# Altium PCB LED_Validation_Board.PcbDoc
Units mil, origin at the board's own origin, x right, y up, seen from the top; angles counter-clockwise.
Board outline 3200 x 3750 mil, 2 copper layers (Top Layer, Bottom Layer); 33 components, 40 nets, 148 pads, 50 vias.
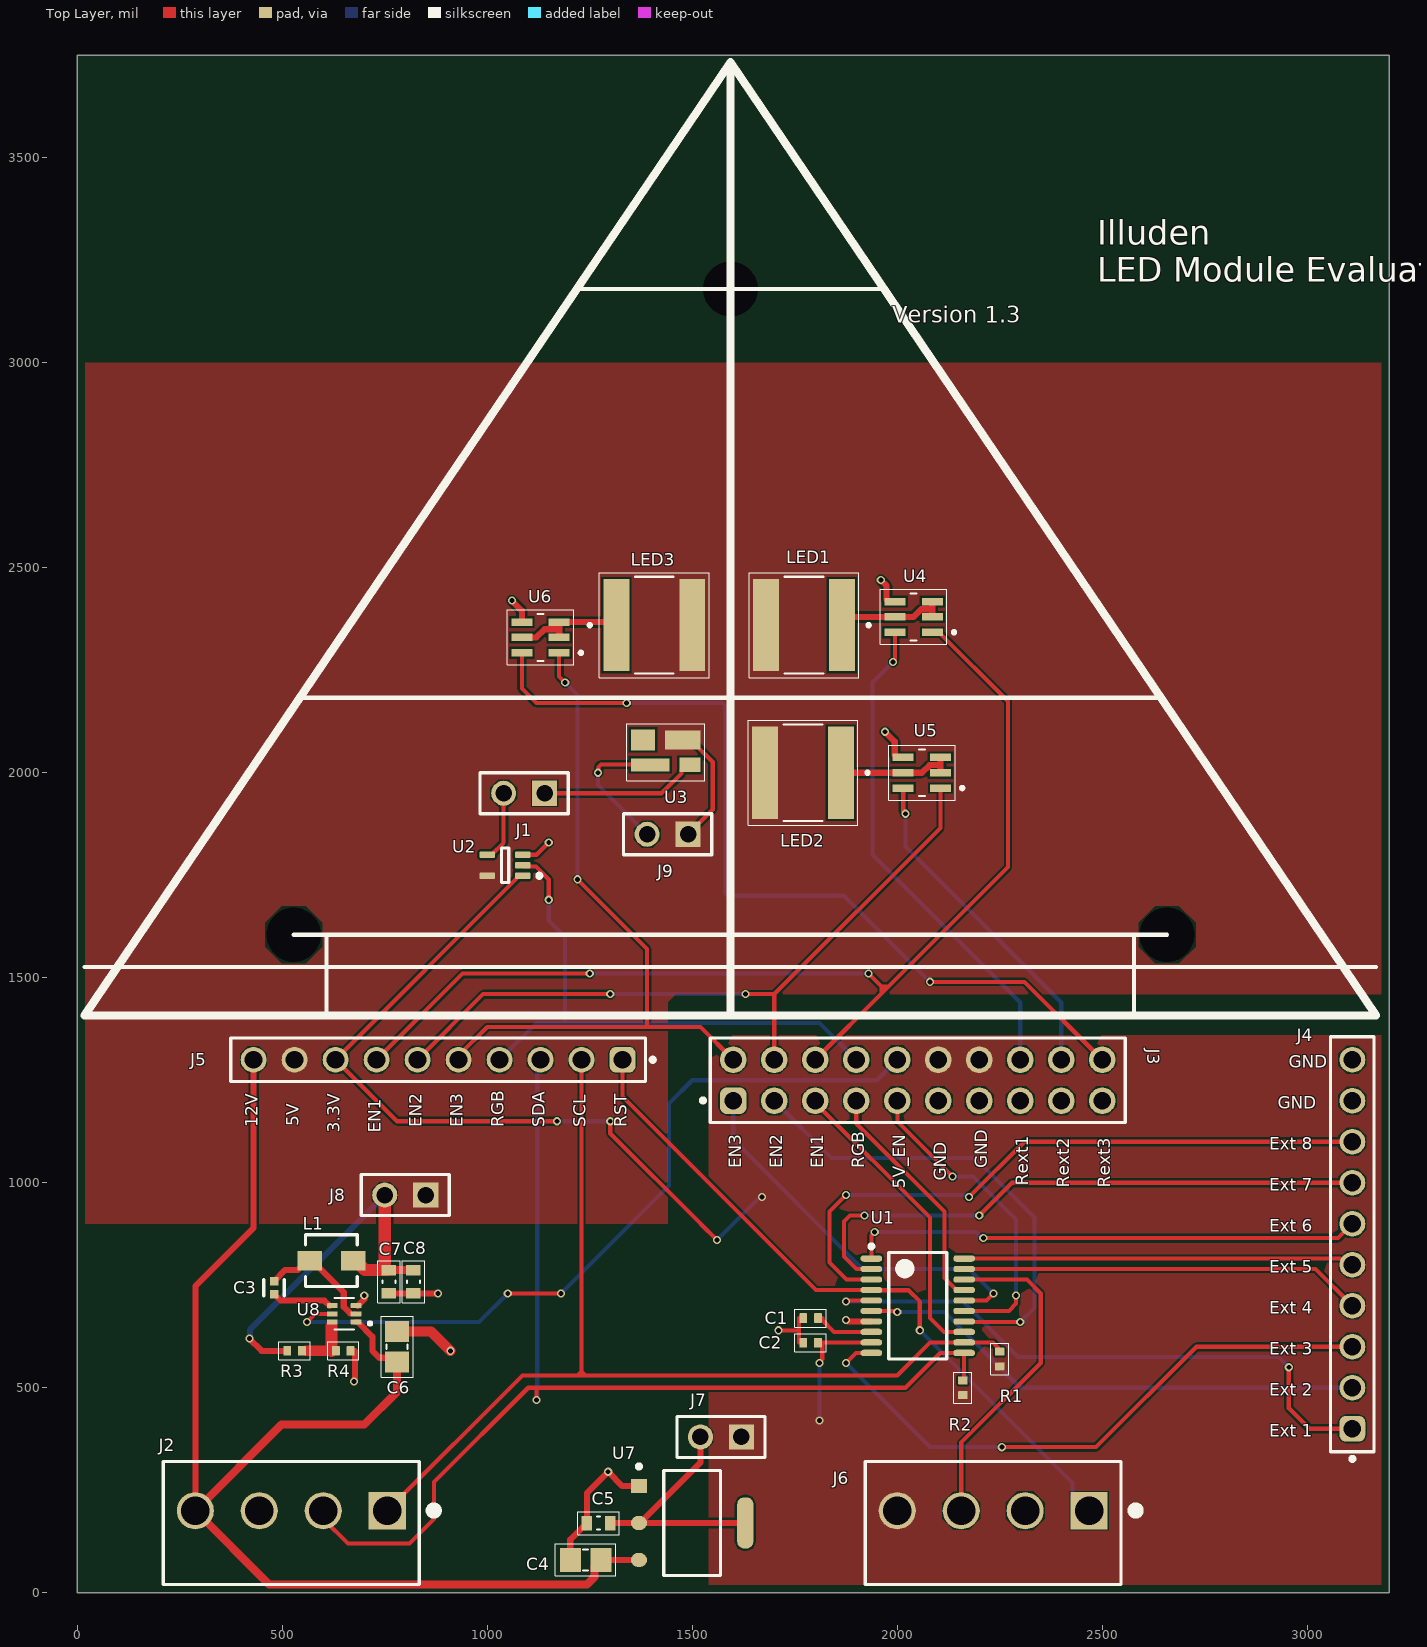
[diagram p0: Top Layer view]
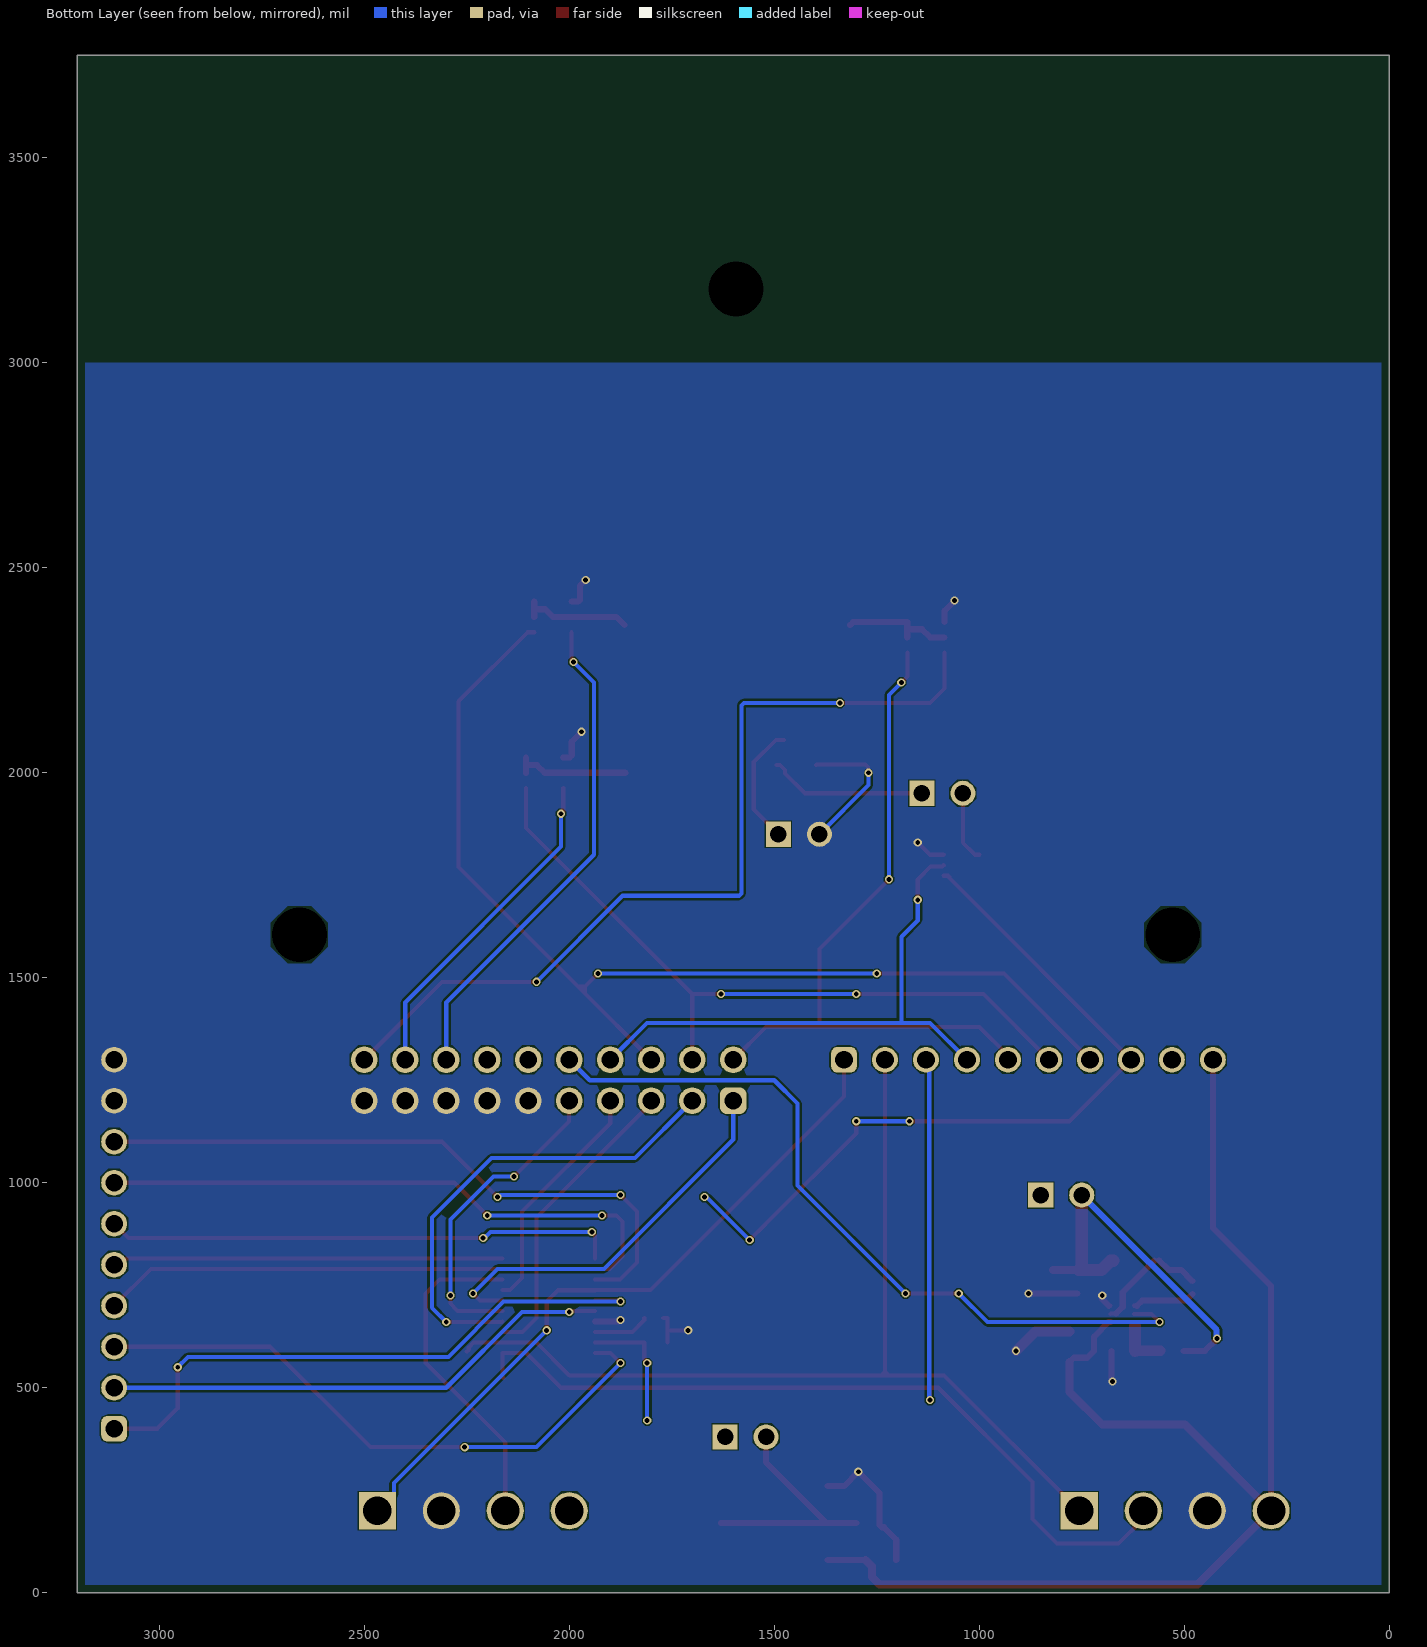
[diagram p1: Bottom Layer view, seen from below]
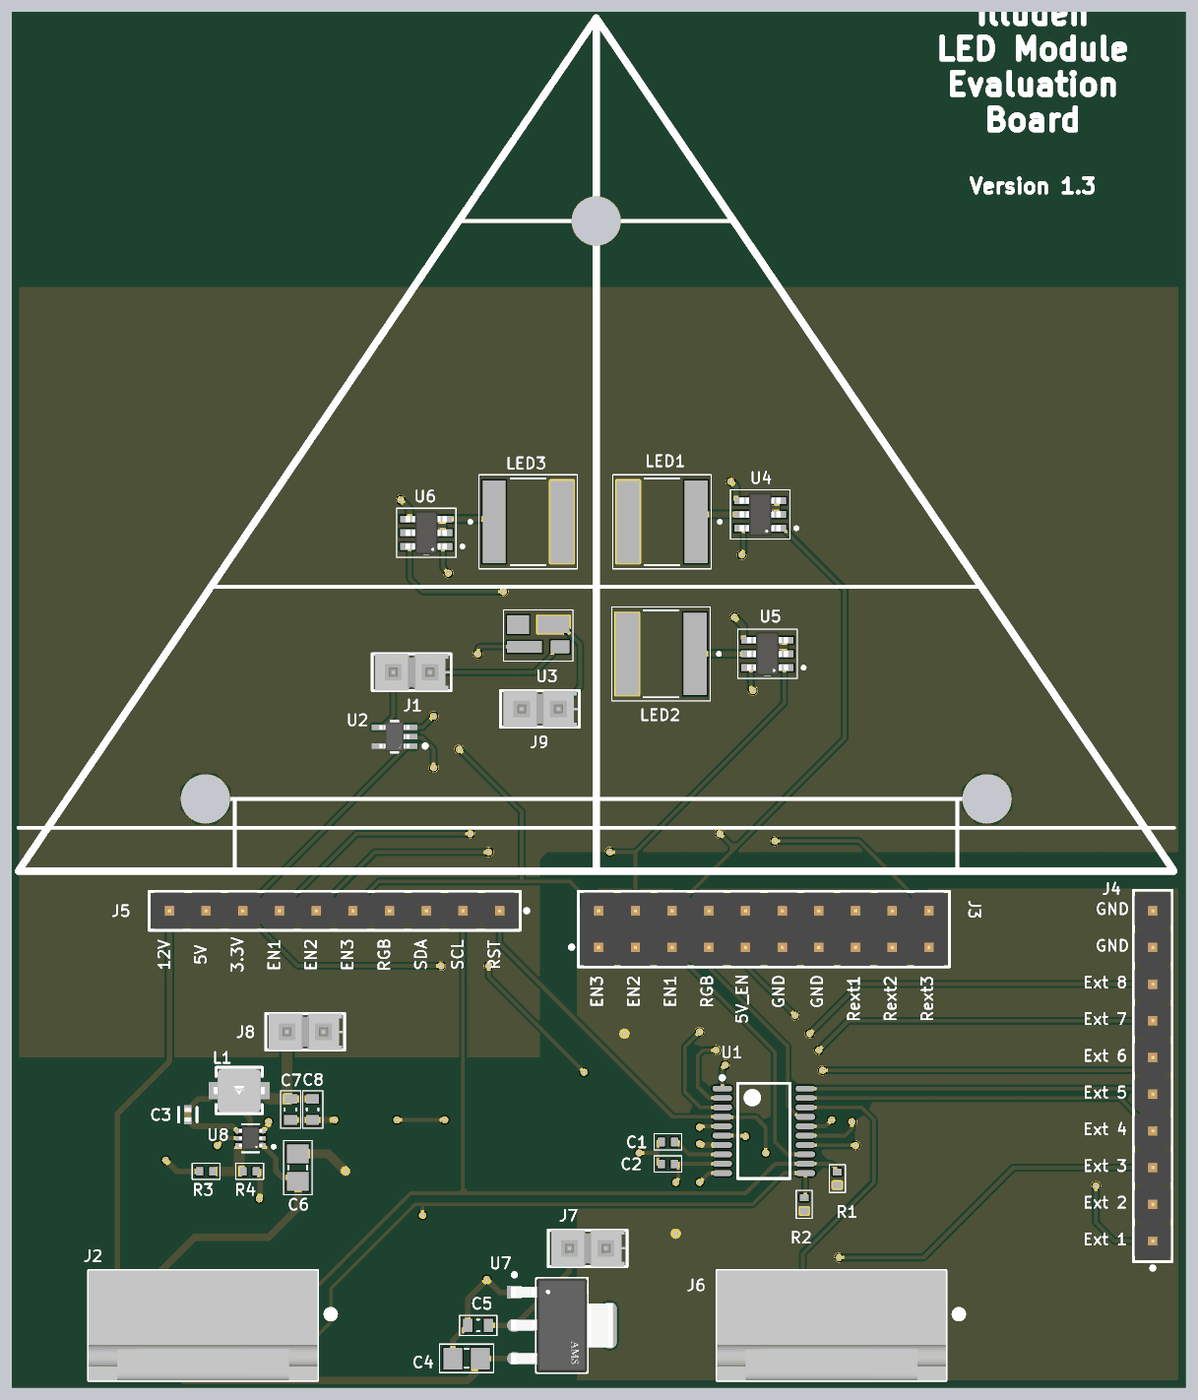
[diagram p2: 3D render of the assembled board from above, using the file's embedded part models]

## Layer stack, top to bottom
Top Solder: solder mask 0.4, Solder Resist, Dk 3.5
Top Layer: signal copper 1.4
Dielectric 1: dielectric 12.6, FR-4, Dk 4.8
Bottom Layer: signal copper 1.4
Bottom Solder: solder mask 0.4, Solder Resist, Dk 3.5

## Board outline
0,0 0,3750 3200,3750 3200,0

## Design rules (kind name [scope] priority, off if disabled: settings)
Clearance [All] p1: gap=5 ignorepadtopadclearanceinfootprint=FALSE except(2: Text-Text Text-Hole; 2.5: THPad-THPad THPad-Via THPad-Fill THPad-Poly THPad-Region THPad-Text THPad-Hole Via-Via Via-Fill Via-Poly Via-Region Via-Text Via-Hole Fill-Fill Fill-Poly Fill-Region Fill-Text Fill-Hole Poly-Poly Poly-Region Poly-Text Poly-Hole Region-Region Region-Text Region-Hole)
PolygonConnect [All] p1: connectstyle=Direct reliefconductorwidth=10 reliefentries=4 polygonreliefangle="90 Angle" airgapwidth=10
RoutingVias [All] p1: holewidth=12 width=20 viastyle="Through Hole" minholewidth=11.81 minwidth=15.75 maxholewidth=28 maxwidth=50
SolderMaskExpansion [All] p1: expansion=4 istentingtop=FALSE
Width [All] p1: maxlimit=100 minlimit=2 preferedwidth=10 minimp=50.000000 maximp=50.000000 favimp=50.000000
30 further rules are at their usual default settings.

## Classes and differential pairs
component class LED_Validation_Board_pg_2: C3 C4 C5 C6 C7 C8 J7 J8 L1 R3 R4 U7 U8
component class LED_Validation_Board_pg_1: C1 C2 J1 J2 J3 J4 J5 J6 J9 LED1 LED2 LED3 R1 R2 U1 U2 U3 U4 U5 U6

## Components (designator, comment, footprint, x,y, rotation, side; value= is the part's Value field where it differs from the comment)
C1 "1uF" "0402 PACKAGE" 1788.54,670 r0 top
C2 "100nF" "0402 PACKAGE" 1788.54,610 r0 top
C3 "100nF" FP-C0402-BB-MFG 480,744.25 r90 top value="0.10 μF"
C4 "10uF" "0805 PACKAGE" 1240,80 r0 top
C5 "22uF" "0603 PACKAGE" 1271.46,170 r0 top
C6 "10uF" "0805 PACKAGE" 780,600 r270 top
C7 "15uF" "0603 PACKAGE" 760,758.54 r90 top
C8 "15uF" "0603 PACKAGE" 820,758.54 r90 top
J1 "TSW-102-26-F-S" SMTC-TSW-102-26-XX-S 1140,1950 r180 top
J2 "640445-4" TECO-640445-4_V 522,200 r180 top
J3 "61302021121" 61302021121 2050,1250 r0 top
J4 "61301011121" 61301011121 3110,850 r90 top
J5 "61301011121" 61301011121 880,1300 r180 top
J6 "640445-4" TECO-640445-4_V 2234,200 r180 top
J7 "TSW-102-26-F-S" SMTC-TSW-102-26-XX-S 1620,380 r180 top
J8 "TSW-102-26-F-S" SMTC-TSW-102-26-XX-S 850,970 r180 top
J9 "TSW-102-26-F-S" SMTC-TSW-102-26-XX-S 1490,1850 r180 top
L1 "2.2uH" FP-IHLP-1212BZ-11-MFG 620,810 r0 top
LED1 "6500K LED" "2424 PACKAGE" 1772.52,2360 r180 top (schematic designator D1)
LED2 "5000K LED" "2424 PACKAGE" 1770,2000 r180 top (schematic designator D2)
LED3 "2700K LED" "2424 PACKAGE" 1407.48,2360 r0 top (schematic designator D3)
R1 "4.7kΩ" "0402 PACKAGE" 2250,570 r270 top
R2 "4.7kΩ" "0402 PACKAGE" 2160,500 r270 top
R3 "52.3kΩ" "0402 PACKAGE" 530,590 r0 top
R4 "10kΩ" "0402 PACKAGE" 648.54,590 r0 top
U1 "STM8S003F3P6" STM-TSSOP20_V 2050,700 r0 top
U2 "SN74LXC1T14DCKR" FP-DCK0005A-MFG 1043.31,1774.41 r180 top
U3 "Neopixel_3535" NEOPIXEL 1380,2080 r0 top
U4 "BCR421UW6-7" SOT95P280X140-6N 2040,2380 r180 top
U5 "BCR421UW6-7" SOT95P280X140-6N 2060,2000 r180 top
U6 "BCR421UW6-7" SOT95P280X140-6N 1130,2330 r180 top
U7 "AMS1117-3.3" FP-AMS1117-IPC_C 1499.72,170.16 r0 top
U8 "AP62301" AP62301 651.06,680.32 r180 top

## Footprints (in the part's own frame and the unit in brackets; to place one, negate y for a bottom-side part, rotate by r counter-clockwise, add the part's x,y. Pads: shape width x height; smd on the part's side, far side on the other; paste and mask are expansions set on the pad)
"0402 PACKAGE" [mm]
  rrect20% 0.49x0.6 smd: 1(-0.455,0) 2(0.455,0)
  silkscreen extent -0.97,-0.56 0.97,0.56
"0603 PACKAGE" [mm]
  rect 0.65x0.9 smd: 1(-0.725,0) 2(0.725,0)
  silkscreen extent -1.3,-0.71 1.3,0.69
"0805 PACKAGE" [mm]
  rect 1.3x1.5 smd: 1(-0.95,0) 2(0.95,0)
  silkscreen extent -1.88,-0.99 1.88,0.99
"2424 PACKAGE" [mm]
  rect 1.6x5.7 smd: 1(-2.35,0) 2(2.35,0)
  silkscreen extent -4.1,-3.25 3.4,3.25
61301011121 [mm] "Pin Header, pitch 2.54 mm, THT, Vertical, single row, 10p"
  rrect50% 1.6x1.6 hole 1.1: 1(-11.43,0)
  round 1.6 hole 1.1: 2(-8.89,0) 3(-6.35,0) 4(-3.81,0) 5(-1.27,0) 6(1.27,0) 7(3.81,0) 8(6.35,0) 9(8.89,0) 10(11.43,0)
  silkscreen extent -13.42,-1.35 12.85,1.35, body extent -12.7,-1.27 12.7,1.27, height 8.57
61302021121 [mm] "Pin Header, pitch 2.54 mm, THT, Vertical, dual row, 20p"
  rrect50% 1.65x1.65 hole 1.1: 1(-11.43,-1.27)
  round 1.65 hole 1.1: 2(-11.43,1.27) 3(-8.89,-1.27) 4(-8.89,1.27) 5(-6.35,-1.27) 6(-6.35,1.27) 7(-3.81,-1.27) 8(-3.81,1.27) 9(-1.27,-1.27) 10(-1.27,1.27) 11(1.27,-1.27) 12(1.27,1.27) 13(3.81,-1.27) 14(3.81,1.27) 15(6.35,-1.27) 16(6.35,1.27) 17(8.89,-1.27) 18(8.89,1.27) 19(11.43,-1.27) 20(11.43,1.27)
  silkscreen extent -13.43,-2.62 12.85,2.62, body extent -12.7,-2.54 12.7,2.54, height 8.59
AP62301 [mm] "Buck Converter"
  rrect16% 0.66x0.31 smd: 1(-0.735,0.5) 2(-0.735,0) 3(-0.735,-0.5) 4(0.735,-0.5) 5(0.735,0) 6(0.735,0.5)
  silkscreen extent -1.7,-0.97 0.6,0.97, body extent -0.8,-0.8 0.8,0.8, height 0.6
FP-AMS1117-IPC_C [mm]
  rect 1.004x0.872 smd paste+0 mask+0: 1(-3.295,2.29)
  rrect100% 1.004x0.872 smd paste+0 mask+0: 2(-3.295,0) 3(-3.295,-2.29)
  rrect87% 1.004x3.182 smd paste+0 mask+0: 4(3.295,0)
  silkscreen extent -3.42,-3.25 1.75,3.62, body extent -3.9,-3.35 3.9,3.35, height 0.25
FP-C0402-BB-MFG [mm]
  rect 0.52x0.52 smd paste+0 mask+0: 1(-0.4,0) 2(0.4,0)
  silkscreen extent -0.5,-0.64 0.5,0.64, body extent -0.8,-0.4 0.8,0.4, height 0.25
FP-DCK0005A-MFG [mm]
  rrect25% 0.95x0.4 smd paste+0 mask+0: 1(-1.1,0.65) 2(-1.1,0) 3(-1.1,-0.65) 4(1.1,-0.65) 5(1.1,0.65)
  silkscreen extent -2.25,-1.07 0.23,1.07, body extent -1.68,-1.17 1.68,1.17, height 0.25
FP-IHLP-1212BZ-11-MFG [mm]
  rect 1.5x1.2 smd paste+0 mask+0: 1(-1.35,0) 2(1.35,0)
  silkscreen extent -1.6,-1.6 1.6,1.6, body extent -2.2,-1.7 2.2,1.7, height 0.25
NEOPIXEL [mm]
  rect 1.3x0.9 smd: 1(2.9,-1.55)
  rect 2.2x1.2 smd: 2(2.45,0)
  rect 1.5x1.3 smd: 3(0,0)
  rect 2.4x0.8 smd: 4(0.45,-1.55)
  silkscreen extent -1.02,-2.54 3.81,1.02
SMTC-TSW-102-26-XX-S [mm] ".025 SQ Post Terminal Strip Assembly, 1x2 Pins, Vertical, 2.54mm Pitch, Male"
  rect 1.55x1.55 hole 1.02: 1(0,0)
  round 1.55 hole 1.02: 2(2.54,0)
  silkscreen extent -1.46,-1.27 4,1.27, body extent -1.4,-1.27 3.81,1.27, height 8.38
SOT95P280X140-6N [mm]
  rect 1.3x0.47 smd: 1(-1.155,0.95) 2(-1.155,0) 3(-1.155,-0.95) 4(1.155,-0.95) 5(1.155,0) 6(1.155,0.95)
  silkscreen extent -2.6,-1.7 2.06,1.7, body extent -1.43,-1.5 1.43,1.5, height 1.4
STM-TSSOP20_V [mm] "SOP, 20-Leads, Body 6.6x4.5mm, Pitch 0.65mm"
  oval 1.35x0.4 smd: 1(-2.875,2.925) 2(-2.875,2.275) 3(-2.875,1.625) 4(-2.875,0.975) 5(-2.875,0.325) 6(-2.875,-0.325) 7(-2.875,-0.975) 8(-2.875,-1.625) 9(-2.875,-2.275) 10(-2.875,-2.925) 11(2.875,-2.925) 12(2.875,-2.275) 13(2.875,-1.625) 14(2.875,-0.975) 15(2.875,-0.325) 16(2.875,0.325) 17(2.875,0.975) 18(2.875,1.625) 19(2.875,2.275) 20(2.875,2.925)
  silkscreen extent -3,-3.3 1.8,3.8, body extent -2.25,-3.3 2.25,3.3, height 1.2
TECO-640445-4_V [mil] "CONN, 4-Leads, Body 7.62x15.85mm, Pitch 3.962mm"
  rect 90.55x90.55 hole 70: 1(-234,0)
  round 90.55 hole 70: 2(-78,0) 3(78,0) 4(234,0)
  silkscreen extent -357,-120 312,180, body extent -312,-120 312,180, height 518

## Part data
C1: library part Capacitor, "CAP CER 1UF 10V X5R 0402"
C2: library part Capacitor, "CAP CER 0.1UF 10V X5R 0402"
C3: library part CMP-2008-02046-2, "CAP CER 0.1UF 10V X5R 0402", Capacitance="0.10 μF", Manufacturer=Kemet, Manufacturer Part Number=C0402C104K8PACTU, Package=C0402-BB, Temperature="-55°C to +125°C", Temperature Characteristic=X5R, Temperature Coefficient=15%, Temperature Range High=+125°C, Temperature Range Low=-55°C, Tolerance=0.1, Voltage Rating="10 V", Automotive=No, Category=Cap, ComponentLink2Description=Datasheet, ComponentLink2URL=https://content.kemet.com/datasheets/KEM_C1002_X7R_SMD.pdf, Device Class L1="Passive Components", Device Class L2=Capacitors, Device Class L3="Ceramic Capacitors", Digikey Description="CAP CER 0.1UF 10V X5R 0402", Height=0.55mm, Ipc Land Pattern Name=CAPC10050X50, Lead Free=Yes, Material=Ceramic, Mouser Description="Capacitor 100 nF 10 VDC 0402", Octopart=https://octopart.com/c0402c104k8pactu-kemet-140039, RoHS=TRUE
C4 C6: library part Capacitor, "Chip Multilayer Ceramic Capacitors for General Purpose, 0805, 10uF, X5R, 15%, 10%, 16V"
C5 C7 C8: library part Capacitor, "Chip Multilayer Ceramic Capacitors for General Purpose, 0603, 22uF, X5R, 15%, 20%, 10V"
J1 J7 J8 J9: library part CMP-1024-00329-1, "0.025\" SQ Post Header, Through-hole, Vertical, -55 to 125 degC, 2.54 mm Pitch, 2-Pin, Male, RoHS", Manufacturer=Samtec, Temperature Range="-55 to 125 degC", ComponentLink1Description="Manufacturer URL", ComponentLink1URL=http://www.samtec.com, ComponentLink2Description=Datasheet, ComponentLink2URL=http://www.samtec.com/documents/webfiles/pdf/TSW_TH.PDF, ComponentLink3Description="Package Specification", ComponentLink3URL=http://www.samtec.com/documents/webfiles/cpdf/TSW-XXX-XX-XXX-X-XX-XXX-MKT.pdf, DatasheetVersion=F-214, Mounting Technology=Through-hole, Orientation=Vertical, PackageDescription=".025[0.64] SQ. Post Terminal Strip Assembly", PackageReference=TSW-102-26-XX-S, PackageVersion="DM, 8/1988", PartNumber=TSW-102-26-F-S, Pitch="2.54 mm", RoHS=True
J2 J6: library part CMP-1684-00016-1, "Male Header, Pitch 3.962 mm, 1 x 4 Postion, Height 13.716 mm, Tail Length 3.175 mm, -55 to 105 degC, RoHS", Color=White, Current, Rating="7 /  / A", Flammability Rating=UL94V-0, Manufacturer="TE Connectivity", Package Description="Male Header, Pitch 3.962 mm, 1 x 4 Postion, Height 13.716 mm, Tail Length 3.175 mm", Package Reference=THD, Temperature, Operating="-55to+105 /  / °C", Voltage, Rating="600 /  / V", Agency Approvals=CSA,UL, Angle=Straight, Application=Forwire-to-board, Brand/Series=MTA-156Series, Color, Housing=White, Connector Type=Male, Contact Centerline Spacing="0.156 /  / in.", Contact Plating=Tin, Datasheet URL=http://www.te.com/commerce/DocumentDelivery/DDEController?Action=showdoc&DocId=Customer+Drawing%7F640445%7FAD5%7Fpdf%7FEnglish%7FENG_CD_640445_AD5.pdf%7F640445-4, Datasheet Version="Rev. AD5", Diameter, Insulation="0.095\"(SingleWire),0.07\"(MassTerminationWires)", Length, Overall="0.624 /  / \"", Length, Pin="0.125 /  / \"", Length, Terminal Post="0.125 /  / in.", Manufacturer URL=http://www.te.com, Material, Contact=CopperAlloy, Material, Housing=ThermoplasticPolyester, Mount Angle=Vertical, Mounting Hole Size="0.07 /  / \"", Mounting Type=PCBMount, Number of Contacts=4, Number of Positions=4, Number of Rows=1, Pin Spacing="0.156 /  / \"", Primary Type=InterconnectSystem, Special Features=IDC,Pinstrip, Standards=UL94V-0HousingFlammabilityRating,RoHSCompliant,ELVCompliant, Termination=Solder, Type=PCBPlug, Wire, AWG=26-18
J3: library part CMP-1502-01104-3, Color=Black, Contact Resistance=20mΩ, Current Rating=3A, Operating Supply Voltage=250V, Connector Type="Male Pin", Contact Material=Copper, Contact Mating Length=5.9944mm, Contact Plating=Gold, Gender=Male, Lead Pitch=2.54mm, Mount="Through Hole", NexarPartId=32855556, Number of Contacts=20, Number of Pins=20, Number of Positions=20, Number of Rows=2, Orientation=Vertical, Packaging=Bulk, Pitch=2.54mm, REACH SVHC=Unknown, RoHS=Compliant, Row Spacing=2.54mm, Termination=Solder
J4 J5: library part CMP-1502-01082-5, Color=Black, Contact Resistance=20mΩ, Current Rating=3A, Flammability Rating="UL94 V-0", Insulation Resistance=1GΩ, Max Operating Temperature=105°C, Min Operating Temperature=-40°C, Operating Supply Voltage=250V, Connector Type="Male Pin", Contact Gender=Male, Contact Material=Copper, Contact Mating Length=5.9944mm, Contact Plating=Gold, Gender=Male, Height=8.74mm, Housing Material=PBT, Lead Pitch=2.54mm, Length=2.54mm, Mount="Through Hole", NexarPartId=18818159, Number of Contacts=10, Number of Pins=10, Number of Positions=10, Number of Rows=1, Orientation=Vertical, Packaging=Bulk, Pitch=2.54mm, REACH SVHC=Unknown, RoHS=Compliant, Termination=Solder, Voltage Rating=250V, Width=25.4mm
L1: library part CMP-02424-000689-1, "FIXED IND 2.2UH 3A 46 MOHM SMD", Case/Package=1212, Current Rating=3A, DC Resistance (DCR)=46mR, Inductance tolerance=20%, Max Operating Temperature=125°C, Min Operating Temperature=-55°C, Package Quantity=3000, Saturation Current=3.3A, Self Resonant Frequency=55MHz, Test Frequency=100kHz, Contact Plating=Tin, Core Material=Metal, Depth=3.2mm, Height=2mm, Height - Seated (Max)=0.079inch, Inductance=2.2uH, Lead Free="Lead Free", Length=3.6mm, Max DC Current=3A, Military Standard=Not, Mount="Surface Mount", Number of Pins=2, Packaging="Tape and Reel", Radiation Hardening=No, Rated Current-Max=3A, RMS Current (Irms)=3A, RoHS Compliant=Yes, Series=IHLP-1212BZ-11, Shielding=Shielded, Termination=SMD/SMT, Tolerance=20%, Width=3mm
LED1: "6500k LED", Supplier Part Number 1=475-GWPLLRA1.CM-M7N2-XX53-1-700-R18CT-ND, Supplier 1=Digikey
LED2: "5000k LED", Supplier Part Number 1=475-GWPLLRA1.CM-M7N2-XX51-1-700-R18CT-ND, Supplier 1=Digikey
LED3: "2700k LED", Supplier Part Number 1=475-GWPLLRA1.CM-M3M8-XX58-1-700-R18CT-ND, Supplier 1=Digikey
R1 R2: library part Resistor
R3 R4: library part Resistor, "RES 10K OHM 1% 1/16W 0402"
  R3: Supplier 1=Mouser
  R4: Supplier 1="Future Electronics"
U1: library part CMP-2000-07166-1, "Value Line, 16 MHz STM8S 8-Bit MCU, 8 Kbyte Flash, 128 Byte Data EEPROM, 10-Bit ADC, 3 Timers, 2.95 to 5.5 V, -40 to 85 degC, 20-Pin TSSOP, RoHS, Tube", Manufacturer=STMicroelectronics, Operating Temperature=-40°C~85°C, Package / Case="20-TSSOP(0.173\",4.40mmWidth)", Package Description="20-Pin Thin Shrink Small Outline Package, Body 6.5 x 4.4 mm, Pitch 0.65 mm", Package Reference=TSSOP20, Package Version="Rev. 2, 01/2015", Standard Package=74, Voltage - Supply (Vcc/Vdd)=2.95V~5.5V, Category=IntegratedCircuits(ICs), Connectivity=I²C,IrDA,LIN,SPI,UART/USART, Core Processor=STM8, Core Size=8-Bit, Data Converters=A/D5x10b, Datasheet URL=http://www2.st.com/content/ccc/resource/technical/document/datasheet/42/5a/27/87/ac/5a/44/88/DM00024550.pdf/files/DM00024550.pdf/jcr:content/translations/en.DM00024550.pdf, Datasheet Version="Rev. 8, 04/2016", Dynamic Catalog=STM8S, EEPROM Size=128x8, Family=Embedded-Microcontrollers, Featured Product=FlasherSeriesofProductionTools, Manufacturer URL=http://www.st.com/, Mounting Technology=SurfaceMount, Number of I /O=16, Number of I/Os=16, Oscillator Type=Internal, Other Names=497-11946-5, Other Related Documents=STM8S003F3ViewAllSpecifications, Package URL=http://www.st.com/st-web-ui/static/active/en/resource/technical/document/datasheet/DM00141386.pdf, Packaging=Tube, Peripherals=Brown-outDetect/Reset,POR,PWM,WDT, Program Memory Size=8KB(8Kx8), Program Memory Type=FLASH, RAM Size=1Kx8, Series=STM8S, Speed=16MHz
U2: library part CMP-04899-000130-1, "IC TRANSLATOR UNIDIR SC70-5"
U4 U5 U6: "LED Driver"
U7: library part CMP-209535-000001-1, "LDO Voltage Regulators 1A, 3.3V", Dropout Voltage=1.1V, Manufacturer="Advanced Monolithic Systems", Max Junction Temp=+125°C, Max Power Dissipation=1.2W, Max Supply Voltage=15V, Nominal Supply Current=5mA, Output Current=1A, Output Voltage=3.3V, Package=AMS1117, Temperature="-40°C to +125°C", Temperature Range Low=-40°C, Automotive=No, Category=IC, ComponentLink2Description=Datasheet, ComponentLink2URL=http://www.advanced-monolithic.com/pdf/ds1117.pdf, Device Class L1="Integrated Circuits (ICs)", Device Class L2="Power Management ICs", Device Class L3="Voltage Regulators - Linear", Height=1.8mm, Ipc Land Pattern Name=SOT229P700X180-4, Lead Free=Yes, Manufacturer Part Number=AMS1117-3.3, Number Of Outputs=1, Octopart=https://octopart.com/ams1117-3.3-advanced+monolithic+systems-25899300, Output Type=Fixed, RoHS=TRUE, Standoff Height=0.64mm, Temperature Range High=+125°C
U8: "Buck Converter  / SOT-563", Supplier Part Number 1=8144136, Supplier 1="Future Electronics"

## Free pads (board coordinates)
  round 118.11 hole 133.86: 2(528,1604.85) 3(1593,3179.65) 4(2658.3,1604.85)

## Via types
v1: diameter 20, hole 12, Top Layer to Bottom Layer, 50 vias

## Nets (pads, with @x,y where several pads share a name; then routed paths per layer and width w, separated by ;. In a path a pad name is that pad's centre, name@x,y a point inside that pad or via, vN(x,y) a via of type N, cw(c..) or ccw(c..) an arc to the next point about the centre after c; other vN are vias at no path point)
5V_EN: J3.10 U8.5 | length 1892.8
  Top Layer w10: v1(560,660) 580.32,680.32 U8.5 ; v1(1050,730) v1(1180,730)
  Bottom Layer w10: v1(560,660) 980,660 v1(1050,730) ; v1(1180,730) 1443.64,993.64 1443.64,1193.64 1500,1250 1950,1250 J3.10
5V_EN_Input: J3.9 U1.15 | length 778.6
  Top Layer w10: J3.9 2000.19,1199.81 2000.19,1149.81 v1(2135,1015) ; U1.15 2272.2,687.2 2290,705 v1(2290,725)
  Bottom Layer w10: v1(2135,1015) 2185,1015 2290,910 v1(2290,725)
+3v3: C2.2 J3.12 J3.14 J5.8 J6.4 J7.1 R1.2 R2.2 U1.9 U2.1 | length 2240.5
  Top Layer w10: U2.1 1075.79,1748.82 1072.91,1745.94 1072.91,1742.91 J5.8 780,1150 v1(1170,1150) ; v1(1300,1150) 1300,1120.43 1520,900.43 1520,900 v1(1560,860) ; v1(1810,560) 1810,562.71 1817.09,569.79 1817.09,610 1817.52,610.43 U1.9
  Bottom Layer w10: v1(1170,1150) v1(1300,1150) ; v1(1560,860) 1663.09,963.09 1668.09,963.09 v1(1670,965) ; v1(1810,420) v1(1810,560)
+5: J5.9 J8.1 J9.1 LED1.2 LED2.2 LED3.2 U2.5 U3.2 | length 296.8
  Top Layer w10: U3.2 1496.14,2080 1550,2026.14 1550,1910 J9.1
+12: C4.2 C6.2 J2.4 J5.10 U7.3 U8.1 | length 3201.1
  Top Layer w15: J2.4 288,748 430,890 J5.10 ; U8.1 684.09,660.63 720,624.72 720,590 736.76,573.24 769.36,573.24 C6.2 ; C4.2 U7.3
  Top Layer w20: C6.2 780,490 700,410 498,410 J2.4 468,20 1243.28,20 1261.81,38.53 1261.81,64.41 C4.2
EN_1: J3.6 J5.7 U4.1 | length 2686.8
  Top Layer w10: J5.7 940,1510 v1(1250,1510) ; J3.6 1970,1470 ; v1(1930,1510) 1970,1470 ; 1962,1463 1962,1479 1976,1479 ; U4.1 2101.81,2342.6 2270,2174.41 2270,1770 1970,1470
  Bottom Layer w10: 1260,1510 v1(1930,1510)
EN_1_Input: J3.5 U1.13 | length 743.2
  Top Layer w10: J3.5 1800,1195 2080,915 2080,670 2113.98,636.02 U1.13
EN_2: J3.4 J5.6 U5.1 | length 1766.8
  Top Layer w10: J5.6 990,1460 v1(1300,1460) ; v1(1630,1460) 1700,1460 ; J3.4 1700,1460 ; U5.1 2105.47,1865.47 1700,1460
  Bottom Layer w10: v1(1300,1460) v1(1630,1460)
EN_2_Input: J3.3 U1.14 | length 1160
  Top Layer w10: U1.14 2164,660.81 2299.19,660.81 v1(2300,660)
  Bottom Layer w10: J3.3 1840,1060 2190,1060 2335,915 2335,695 v1(2300,660)
EN_3: J3.2 J5.5 U6.1 | length 1743.6
  Top Layer w10: J5.5 930,1310 1000,1380 1390,1380 ; U6.1 1175.47,2234.53 v1(1190,2220) ; v1(1220,1740) 1390,1570 1390,1380 ; J3.2 1520,1380 1390,1380
  Bottom Layer w10: v1(1190,2220) 1220,2190 v1(1220,1740)
EN_3_INPUT: J3.1 U1.16 | length 964.3
  Top Layer w10: U1.16 2217.8,712.8 v1(2235,730)
  Bottom Layer w10: J3.1 1600,1105 1915,790 2175,790 v1(2235,730)
extra_1: J4.1 U1.5 | length 1485
  Top Layer w10: v1(1875,710) 1877.8,712.8 U1.5 ; v1(2955,550) 2955,450 3005,400 J4.1
  Bottom Layer w10: v1(1875,710) 2160,710 2295,575 2930,575 v1(2955,550)
extra_2: J4.2 U1.6 | length 1250.7
  Top Layer w10: U1.6 1997.8,687.2 v1(2000,685)
  Bottom Layer w10: v1(2000,685) 2115,685 2300,500 J4.2
extra_3: J4.3 U1.10 | length 1493.5
  Top Layer w10: v1(1875,560) 1899.84,584.84 U1.10 ; v1(2255,355) 2485,355 2730,600 J4.3
  Bottom Layer w10: v1(1875,560) 2080,355 v1(2255,355)
extra_4: J4.4 U1.19 | length 983.9
  Top Layer w10: U1.19 3020.43,789.57 J4.4
extra_5: J4.5 U1.20 | length 953.1
  Top Layer w10: U1.20 3080.5,815.16 3095.66,800 J4.5
extra_6: J4.6 U1.1 | length 1253.9
  Top Layer w10: U1.1 1936.81,871.81 v1(1945,880) ; v1(2210,865) 3075,865 J4.6
  Bottom Layer w10: v1(1945,880) 2192.29,880 2207.29,865 v1(2210,865)
extra_7: J4.7 U1.2 | length 1443.8
  Top Layer w10: v1(1920,920) 1885,920 1870,905 1870,820 1900.43,789.57 U1.2 ; v1(2200,920) 2280,1000 J4.7
  Bottom Layer w10: v1(1920,920) v1(2200,920)
extra_8: J4.8 U1.3 | length 1593.4
  Top Layer w10: v1(1875,970) 1835,930 1835,805 1876.02,763.98 U1.3 ; v1(2175,965) 2310,1100 J4.8
  Bottom Layer w10: v1(1875,970) 2167.29,970 2172.29,965 v1(2175,965)
GND: C1.1 C2.1 C4.1 C5.1 C6.1 C7.1 C8.1 J2.3 J3.11 J3.13 J3.15 J3.17 J3.19 J4.9 J4.10 J6.2 J9.2 R4.2 U1.7 U2.3 U3.4 U4.4 U5.4 U6.4 U7.1 U8.3 | length 1559.9
  Top Layer w10: U8.3 U8.3@684.09,700 ; U2.3 1120,1800 v1(1150,1830) ; v1(1270,2000) 1271.21,2001.21 1271.21,2014.14 1277.07,2020 1396.69,2020 U3.4 ; v1(1710,640) 1760,640 ; 1760,610 1760,640 ; C1.1 1760,670 1760,640
  Top Layer w15: v1(675,515) 677.09,517.09 677.09,590 ; U8.3@684.09,700 700,715.91 v1(700,725) ; C7.1 C8.1 v1(880,730) ; v1(1060,2420) 1084.53,2395.47 U6.4 ; C4.1 1202.6,129.68 1232.7,159.78 1237.62,159.78 1242.91,165.08 C5.1 1242.91,242.91 v1(1295,295) 1329.68,260.32 U7.1 ; v1(1875,665) 1876.35,665 1879.74,661.61 U1.7 ; v1(1960,2470) 1973.94,2456.06 1973.94,2421.65 1978.19,2417.4 U4.4 ; v1(1970,2100) 1993.94,2076.06 1993.94,2041.65 1998.19,2037.4 U5.4
  Top Layer w25: C6.1 862.6,637.4 v1(910,590)
  Bottom Layer w10: v1(1270,2000) 1270,1970 J9.2
NetC1_2: C1.2 U1.8 | length 136.7
  Top Layer w10: 1817.09,670 1817.09,665.08 1846.14,636.02 U1.8
NetC3_1: C3.1 U8.4 | length 153.9
  Top Layer w10: U8.4@615.24,700 U8.4
  Top Layer w15: C3.1 495.91,712.6 602.64,712.6 U8.4@615.24,700
NetC3_2: C3.2 L1.1 U8.2 | length 295.2
  Top Layer w10: L1.1@560.94,810 L1.1 L1.1@572.76,810 ; 665.92,681.42 678.9,681.42 U8.2
  Top Layer w15: C3.2 507.4,787.4 538.35,787.4 L1.1@560.94,810 ; L1.1@572.76,810 650,732.76 650,697.34 665.92,681.42
NetC5_2: C5.2 J7.2 U7.2 U7.4 | length 600.4
  Top Layer w15: C5.2 1300.16,170.16 U7.2 U7.2@1372.6,170.16 ; J7.2 1520,317.56 U7.2@1372.6,170.16 ; U7.4 U7.2@1372.6,170.16
NetC7_2: C7.2 C8.2 J8.2 L1.2 R3.1 | length 923.1
  Top Layer w15: v1(420,620) 450,590 501.46,590 ; C7.2@750,794.88 757.8,787.09 C7.2
  Top Layer w20: C7.2 C8.2
  Top Layer w30: L1.2 679.06,810 701.97,787.09 C7.2@757.8,787.09 ; C7.2@750,794.88 J8.2
  Bottom Layer w15: v1(420,620) 420.96,620.96 420.96,640.96 J8.2
NetJ1_1: J1.1 U3.1 | length 387.4
  Top Layer w10: J1.1 1425.2,1950 1473.58,1998.39 1473.58,2006.26 1486.3,2018.98 U3.1
NetJ1_2: J1.2 U2.4 | length 172.9
  Top Layer w10: U2.4 1010.83,1800 1040,1829.17 J1.2
NetR3_2: R3.2 R4.1 U8.6 | length 121.5
  Top Layer w25: 558.54,590 620,590
  Top Layer w30: 620,590 620,650
OUT_1: LED1.1 U4.2 U4.3 U4.5 | length 273.9
  Top Layer w15: LED1.1 1885.04,2380 U4.5 2040,2380 2058.7,2398.7 2085.47,2398.7 ; U4.2 2085.47,2398.7 ; U4.3 2085.47,2398.7
OUT_2: LED2.1 U5.2 U5.3 U5.5 | length 288.1
  Top Layer w15: LED2.1 U5.5 2060,2000 2078.7,2018.7 2105.47,2018.7 ; U5.2 2105.47,2018.7 ; U5.3 2105.47,2018.7
OUT_3: LED3.1 U6.2 U6.3 U6.5 | length 279.7
  Top Layer w15: U6.5 1120,2330 1140,2350 1174.17,2350 1175.47,2348.7 ; U6.2 1175.47,2348.7 ; LED3.1 1307.56,2367.4 U6.3 1175.47,2348.7
PD1: J6.3 U1.18 | length 811.2
  Top Layer w10: J6.3 2156,366 2350,560 2350,730 2316.02,763.98 U1.18
Rext_1: J3.16 U4.6 | length 1214.3
  Top Layer w10: v1(1990,2270) 1990,2272.71 1994.53,2277.23 U4.6
  Bottom Layer w10: v1(1990,2270) 1940,2220 1940,1800 2300,1440 J3.16
Rext_2: J3.18 U5.6 | length 822.3
  Top Layer w10: U5.6 2014.53,1905.47 v1(2020,1900)
  Bottom Layer w10: v1(2020,1900) 2020,1820 2400,1440 J3.18
Rext_3: J3.20 U6.6 | length 2146.1
  Top Layer w10: U6.6 1084.53,2205.47 1120,2170 v1(1340,2170) ; v1(2080,1490) 2310,1490 J3.20
  Bottom Layer w10: v1(1340,2170) 1574.14,2170 1580,2164.14 1580,1705.86 1585.86,1700 1870,1700 v1(2080,1490)
RGB_SIG: J3.8 J5.4 U2.2 | length 1388.8
  Top Layer w10: U2.2 1089.49,1771.54 1118.46,1771.54 1150,1740 v1(1150,1690)
  Bottom Layer w10: J5.4 1120,1390 1190,1390 ; v1(1150,1690) 1150,1640 1190,1600 1190,1390 ; J3.8 1810,1390 1190,1390
RGB_SIG_Input: J3.7 U1.17 | length 581.6
  Top Layer w10: J3.7 1900,1145 2115,930 2115,767.87 2144.49,738.39 U1.17
RST: J5.1 J6.1 U1.4 | length 1703.2
  Top Layer w10: J5.1 1330,1210 1801.61,738.39 U1.4 1937.43,737.76 2027.24,737.76 2055,710 v1(2055,640)
  Bottom Layer w10: v1(2055,640) 2427.72,267.28 2427.72,240.28 J6.1
SCL: J2.1 J5.2 R1.1 U1.12 | length 2480.9
  Top Layer w10: J2.1 1086,530 1220,530 ; J5.2 1230,540 ; 1245,530 1240,530 ; R1.1 2249.72,587.91 2245.08,592.56 2245.08,598.54 2233.19,610.43 U1.12 2080.43,610.43 2000,530 1240,530 ; 1220,530 1231.84,530 ; 1220,530 1230,540 ; 1230,540 1230,531.84 1231.84,530 ; 1230,540 1240,530 ; 1231.84,530 1240,530
SDA: J2.2 J5.3 R2.1 U1.11 | length 2780
  Top Layer w10: J2.2 600,180 660,120 810,120 870,180 870,270 1100,500 1120,500 ; v1(1120,470) 1120,500 ; R2.1@2160,523.62 2163.19,526.81 U1.11 2104.84,584.84 2020,500 1120,500
  Bottom Layer w10: v1(1120,470) 1121.91,471.91 1121.91,1291.91 J5.3
pads on no net: U3.3

## Polygon pours and split planes (outlines as drawn)
+3v3 on Top Layer "+3V3_L01_P003" (solid, pour order 3): 1540,20 1540,1360 3180,1360 3180,20
+5 on Top Layer "+5_L01_P004" (solid, pour order 4): 20,900 20,3000 3180,3000 3180,1460 1460,1460 1440,1440 1440,900
GND on Bottom Layer "GND_L02_P002" (solid, pour order 2): 20,20 20,3000 3180,3000 3180,20

## Silkscreen, mask and mechanical layers (free items; w line width, h text height)
Top Overlay:
  lines w10: 18,1526.11 3168,1526.11 ; 528,1604.85 1593,1604.85 2658.3,1604.85 ; 543,2183 2643,2183 ; 608,1408 608,1604.85 ; 1223,3179.65 1968,3179.65 ; 2577.25,1408 2577.25,1604.85
  lines w20: 1593,1408 1593,3730.83 ; 18,1408 1593,3733 3167.61,1408.39 3167.61,1408 18,1408
  text "Illuden / LED Module Evaluation Board" at 2488.09,3198 h60
  text "Version 1.3" at 1988.25,3098 h40
  text "GND" at 2955.01,1280 h30
  text "GND" at 2927.52,1180 h30
  text "5V" at 540,1137.51 h30 r90
  text "12V" at 440,1135.01 h30 r90
  text "EN2" at 840,1135.01 h30 r90
  text "EN3" at 940,1135.01 h30 r90
  text "RGB" at 1040,1135.01 h30 r90
  text "SDA" at 1140,1135.01 h30 r90
  text "SCL" at 1240,1135.01 h30 r90
  text "RST" at 1340,1135.01 h30 r90
  text "3.3V" at 640,1122.52 h30 r90
  text "EN1" at 740,1122.52 h30 r90
  text "Ext 8" at 2907.52,1080 h30
  text "EN3" at 1620,1035.01 h30 r90
  text "EN2" at 1720,1035.01 h30 r90
  text "EN1" at 1820,1035.01 h30 r90
  text "RGB" at 1920,1035.01 h30 r90
  text "GND" at 2220,1035.01 h30 r90
  text "GND" at 2120,1005.02 h30 r90
  text "Rext1" at 2320,992.52 h30 r90
  text "Rext2" at 2420,987.52 h30 r90
  text "Rext3" at 2520,987.52 h30 r90
  text "5V_EN" at 2020,985.02 h30 r90
  text "Ext 7" at 2907.52,980 h30
  text "Ext 6" at 2907.52,880 h30
  text "Ext 5" at 2907.52,780 h30
  text "Ext 4" at 2907.52,680 h30
  text "Ext 3" at 2907.52,580 h30
  text "Ext 2" at 2907.52,480 h30
  text "Ext 1" at 2907.52,380 h30
Board Outline:
  the board outline again, w3